# Altium PCB PCB1.pcbdoc
Units mil, origin at the board's own origin, x right, y up, seen from the top; angles counter-clockwise.
Board outline 3750 x 4952.59 mil, 2 copper layers (Top Layer, Bottom Layer); 99 components, 79 nets, 339 pads, 110 vias.
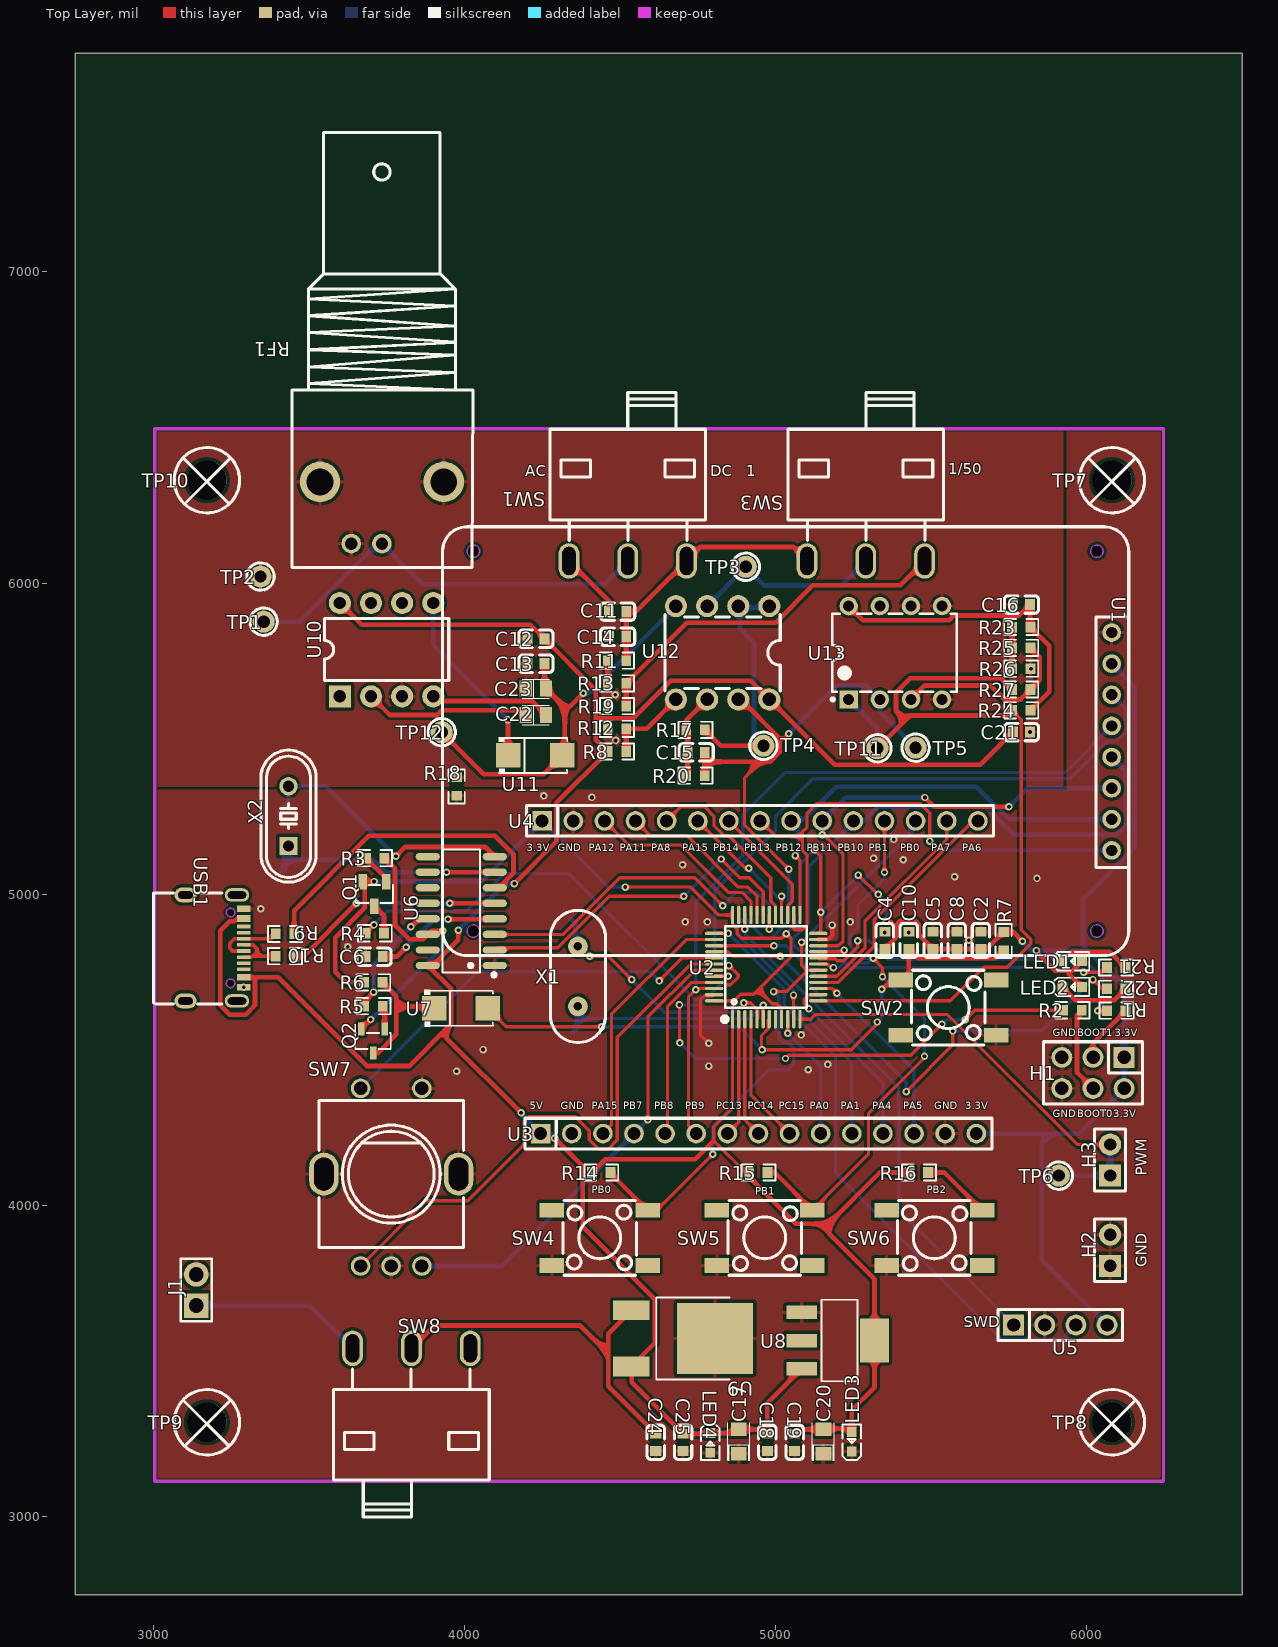
[diagram p0: Top Layer view]
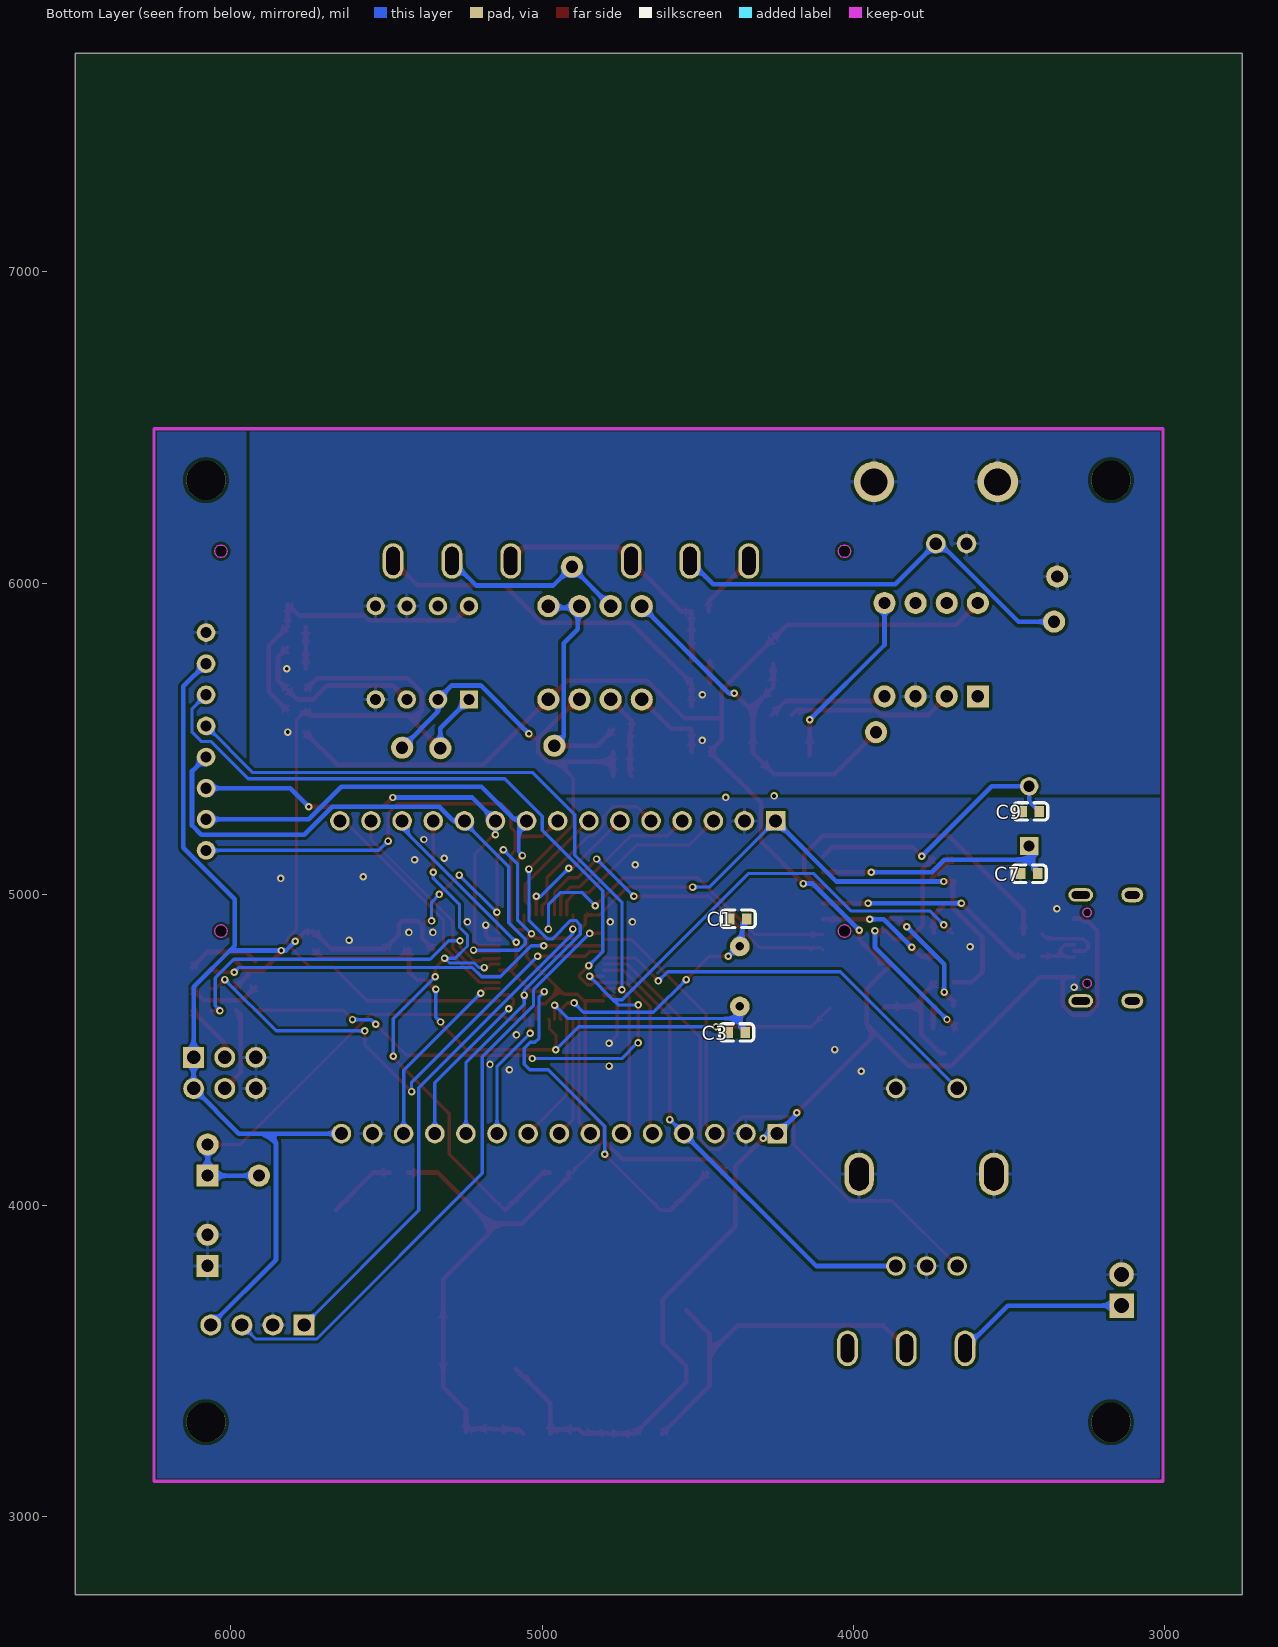
[diagram p1: Bottom Layer view, seen from below]

## Layer stack, top to bottom
Top Solder Mask Layer: solder mask 0.4, Solder Resist, Dk 3.5
Top Layer: signal copper 1.4
Dielectric1: dielectric 12.6, FR-4, Dk 4.8
Bottom Layer: signal copper 1.4
Bottom Solder Mask Layer: solder mask 0.4, Solder Resist, Dk 3.5

## Board outline
6500,2750 2750,2750 2750,7702.59 6500,7702.59

## Design rules (kind name [scope] priority, off if disabled: settings)
BoardOutlineClearance copperThickness1oz_1 [All] p1: gap=10 ignorepadtopadclearanceinfootprint=FALSE except(0: Arc-SplitContinuation Track-SplitContinuation SMDPad-SplitContinuation THPad-SplitContinuation Via-SplitContinuation Fill-SplitContinuation Poly-SplitContinuation Region-SplitContinuation Text-SplitContinuation; 6: Track-CutoutEdge SMDPad-CutoutEdge THPad-CutoutEdge Via-CutoutEdge Region-CutoutEdge; 11.8: Track-OutlineEdge SMDPad-OutlineEdge THPad-OutlineEdge Via-OutlineEdge Fill-OutlineEdge Fill-CutoutEdge Poly-OutlineEdge Region-OutlineEdge Text-OutlineEdge)
BoardOutlineClearance copperThickness2oz_1 [All] p2: gap=10 ignorepadtopadclearanceinfootprint=FALSE except(0: Arc-SplitContinuation Track-SplitContinuation SMDPad-SplitContinuation THPad-SplitContinuation Via-SplitContinuation Fill-SplitContinuation Poly-SplitContinuation Region-SplitContinuation Text-SplitContinuation; 6: Track-CutoutEdge SMDPad-CutoutEdge THPad-CutoutEdge Via-CutoutEdge Region-CutoutEdge; 11.8: Track-OutlineEdge SMDPad-OutlineEdge THPad-OutlineEdge Via-OutlineEdge Fill-OutlineEdge Fill-CutoutEdge Poly-OutlineEdge Region-OutlineEdge Text-OutlineEdge)
Clearance copperThickness1oz [(InNet('PD0') OR InNet('GND') OR InNet('3.3V') OR InNet('PD1') OR InNet('$1N3764') OR InNet('$1N4985') OR InNet('$1N4983') OR InNet('NRST') OR InNet('$1N8215') OR InNet('$1N7428') OR InNet('+5V') OR InNet('AGND') OR InNet('-5V') OR InNet('$1N7417') OR InNet('3V3') OR InNet('$1N9080') OR InNet('$1N9081') OR InNet('VBAT1') OR InNet('$1N9083') OR InNet('$1N3118') OR InNet('$1N3144') OR InNet('VBAT') OR InNet('$1N2700') OR InNet('$1N7921') OR InNet('PA2') OR InNet('PA3') OR InNet('PA4') OR InNet('PA5') OR InNet('PA6') OR InNet('$1N5468') OR InNet('$1N5472') OR InNet('$1N5608') OR InNet('$1N5280') OR InNet('$1N5593') OR InNet('BOOT1') OR InNet('BOOT0') OR InNet('$1N5306') OR InNet('$1N7431') OR InNet('D-') OR InNet('DN') OR InNet('D+') OR InNet('DP') OR InNet('$1N7412') OR InNet('$1N7434') OR InNet('PB0') OR InNet('PB1') OR InNet('PB2') OR InNet('$1N7426') OR InNet('PB3') OR InNet('PB4') OR InNet('$1N8720') OR InNet('$1N8718') OR InNet('$1N8207') OR InNet('$1N7427') OR InNet('PB6') OR InNet('PB7') OR InNet('PB5') OR InNet('PA7') OR InNet('PC13') OR InNet('PC14') OR InNet('PC15') OR InNet('PA0') OR InNet('PA1') OR InNet('PB10') OR InNet('PB11') OR InNet('PB12') OR InNet('PB13') OR InNet('PB14') OR InNet('PB15') OR InNet('PA8') OR InNet('PA9') OR InNet('PA10') OR InNet('PA11') OR InNet('PA12') OR InNet('PA13') OR InNet('PA14') OR InNet('PA15') OR InNet('PB8') OR InNet('PB9'))] p1: gap=6 ignorepadtopadclearanceinfootprint=FALSE except(4: Track-Track; 6.9: Track-Hole SMDPad-Hole THPad-Hole Via-Hole Fill-Hole Poly-Hole Region-Hole Text-Hole; 7: Arc-Arc Arc-Track Arc-SMDPad Arc-THPad Arc-Via Arc-Fill Arc-Poly Arc-Region Arc-Text Arc-Hole; 11.8: Track-Fill Fill-Region)
Clearance copperThickness2oz [All] p2: gap=6 ignorepadtopadclearanceinfootprint=FALSE except(0: Track-Text SMDPad-Text THPad-Text Via-Text Fill-Text Poly-Text Region-Text Text-Text; 6.9: Track-Hole SMDPad-Hole THPad-Hole Via-Hole Fill-Hole Poly-Hole Region-Hole Text-Hole; 7: Arc-Arc Arc-Track Arc-SMDPad Arc-THPad Arc-Via Arc-Fill Arc-Poly Arc-Region Arc-Text Arc-Hole; 8: Track-Track; 11.8: Track-Fill Fill-Region)
DiffPairsRouting differentialPair [All] p1: maxlimit=6 minlimit=6 mostfreqgap=6 toplayer_minwidth=5 toplayer_maxwidth=100 toplayer_prefwidth=10 bottomlayer_minwidth=5 bottomlayer_maxwidth=100 bottomlayer_prefwidth=10 maxuncoupledlength=10
PasteMaskExpansion pasteMaskExpansion [All] p1: expansion=0
PlaneConnect innerPlane [All] p1: planeconnectstyle=Relief reliefexpansion=20 reliefentries=4 reliefconductorwidth=10 reliefairgap=10
PolygonConnect copperRegion [All] p1: connectstyle=Relief reliefconductorwidth=10 reliefentries=4 polygonreliefangle="90 Angle" airgapwidth=10
RoutingVias viaSize [All] p1: holewidth=12 width=24 viastyle="Through Hole" minholewidth=11.8 minwidth=19.7 maxholewidth=248 maxwidth=393.7
SolderMaskExpansion solderMaskExpansion [All] p1: expansion=2 istentingtop=FALSE useseparateexpansions=TRUE expansionbottom=2 istentingbottom=FALSE
Width copperThickness1oz_2 [All] p1: maxlimit=100 minlimit=5 preferedwidth=15
Width copperThickness2oz_2 [All] p2: maxlimit=100 minlimit=8 preferedwidth=10
27 further rules are at their usual default settings.

## Components (designator, comment, footprint, x,y, rotation, side; value= is the part's Value field where it differs from the comment)
C1 "CL10C220JB8NNNC" C0603 4370,4921.49 r180 bottom
C2 "CAP_0603" C0603 5659.79,4852.37 r90 top
C3 "CL10C220JB8NNNC" C0603 4375,4556.49 r180 bottom
C4 "CAP_0603" C0603 5350.89,4852.37 r90 top
C5 "CAP_0603" C0603 5505.34,4852.37 r90 top
C6 "CAP_0603" C0603 3710.02,4800.06 r180 top
C7 "CL10C220JB8NNNC" C0603 3435.12,5066.49 r180 bottom
C8 "CAP_0603" C0603 5582.56,4852.38 r270 top
C9 "CL10C220JB8NNNC" C0603 3430.12,5266.49 r180 bottom
C10 "CAP_0603" C0603 5428.11,4852.37 r90 top
C11 "CAP_0603" C0603 4492.68,5908.93 r180 top
C12 "CGA0603X7R104K500JT" C0603 4230,5821.49 r0 top
C13 "CGA0603X7R104K500JT" C0603 4230,5741.49 r0 top
C14 "CAP_0603" C0603 4492.68,5828.04 r180 top
C15 "CL10C100JB8NNNC" C0603 4745,5456.49 r0 top
C16 "CGA0603X7R104K500JT" C0603 5790,5931.49 r180 top
C17 "TLJR226M010R3800" CAP-SMD_L2.0-W1.3-FD 4881.74,3241.96 r90 top
C18 "CAP_0603" C0603 4973.61,3239.61 r270 top
C19 "CAP_0603" C0603 5061.47,3239.61 r270 top
C20 "TLJR226M010R3800" CAP-SMD_L2.0-W1.3-FD 5153.34,3241.96 r90 top
C21 "CGA0603X7R104K500JT" C0603 5790,5521.61 r0 top
C22 "TAJP106M010RNJ" CAP-SMD_L2.1-W1.4-FD 4230,5576.49 r0 top
C23 "TAJP106M010RNJ" CAP-SMD_L2.1-W1.4-FD 4229.96,5661.49 r0 top
C24 "CC0603KRX7R8BB334" C0603 4615,3239.61 r270 top
C25 "CAP_0603" C0603 4702.86,3239.61 r270 top
H1 "PZ254V-12-6P" HDR-TH_6P-P2.54-V-M-R2-C3-S2.54 6020,4426.49 r180 top
H2 "HDR-M_2.54_1x2P" HDR-TH_2P-P2.54-V-M-1 6075,3856.49 r90 top
H3 "HDR-M_2.54_1x2P" HDR-TH_2P-P2.54-V-M-1 6075,4146.49 r90 top
J1 "电源端子" 2.54-1x2p 3140,3731.49 r90 top
LED1 "LTST-C190KSKT" LED0603-RD 5953.08,4785.18 r0 top
LED2 "LTST-C190KSKT" LED0603-RD 5953.08,4702.47 r0 top
LED3 "LTST-C190KSKT" LED0603-RD 5245,3241.49 r90 top
LED4 "LTST-C190KSKT" LED0603-RD 4790.08,3237.58 r270 top
Q1 "S8550_C20069126" SOT-23-3_L2.9-W1.3-P1.90-LS2.4-BR 3710.97,5001.49 r90 top
Q2 "S8050_C20069125" SOT-23-3_L2.9-W1.3-P1.90-LS2.3-BR 3706.54,4529.09 r90 top
R1 "Res_0603" R0603 6095,4626.49 r0 top
R2 "Res_0603" R0603 5954.07,4627.75 r180 top
R3 "Res_0603" R0603 3713.01,5116.49 r180 top
R4 "Res_0603" R0603 3712.33,4875.25 r180 top
R5 "Res_0603" R0603 3708.01,4641.15 r0 top
R6 "Res_0603" R0603 3707.33,4717.39 r0 top
R7 "Res_0603" R0603 5733.06,4850.18 r90 top
R8 "Res_0603" R0603 4490.49,5459.14 r0 top
R9 "Res_0603" R0603 3423.54,4873.04 r0 top
R10 "Res_0603" R0603 3423.54,4801.8 r0 top
R11 "Res_0603" R0603 4490.49,5751.1 r0 top
R12 "Res_0603" R0603 4490.49,5532.13 r180 top
R13 "Res_0603" R0603 4490.49,5678.11 r180 top
R14 "Res_0603" R0603 4440,4106.49 r180 top
R15 "Res_0603" R0603 4945,4106.49 r180 top
R16 "Res_0603" R0603 5460.68,4106.49 r180 top
R17 "Res_0603" R0603 4742.81,5528.74 r0 top
R18 "Res_0603" R0603 3975.34,5346.83 r90 top
R19 "Res_0603" R0603 4490.49,5605.12 r0 top
R20 "Res_0603" R0603 4742.81,5381.49 r0 top
R21 "Res_0603" R0603 6094.33,4765.18 r180 top
R22 "Res_0603" R0603 6094.32,4696.49 r180 top
R23 "Res_0603" R0603 5789.32,5859.14 r0 top
R24 "Res_0603" R0603 5789.32,5591.49 r0 top
R25 "Res_0603" R0603 5789.32,5792.23 r180 top
R26 "Res_0603" R0603 5789.32,5725.31 r180 top
R27 "Res_0603" R0603 5789.32,5658.4 r0 top
RF1 "KH-BNC75-3511" ANT-TH_KH-BNC75-3511 3735,6226.49 r180 top
SW1 "SS12D10G3-WJ" SW-TH_3P-P4.80_HX-SS12D10G3-WJ 4525,6071.49 r180 top
SW2 "SH-6X6X5H-TP" SW-SMD_SH-6X6X4.5H-TP 5555,4636.49 r0 top
SW3 "SS12D10G3-WJ" SW-TH_3P-P4.80_HX-SS12D10G3-WJ 5290,6071.49 r180 top
SW4 "SH-6X6X5H-TP" SW-SMD_SH-6X6X4.5H-TP 4435,3896.49 r180 top
SW5 "SH-6X6X5H-TP" SW-SMD_SH-6X6X4.5H-TP 4965,3896.49 r0 top
SW6 "SH-6X6X5H-TP" SW-SMD_SH-6X6X4.5H-TP 5510,3896.49 r0 top
SW7 "EC11L1525E05" SW-TH_EC11L1525E05 3765,4091.49 r0 top
SW8 "SS12D10G3-WJ" SW-TH_3P-P4.80_HX-SS12D10G3-WJ 3830,3541.49 r0 top
TP1 "TP-黄色测试点" TESTPOINT-TH_BD3.2 3355,5876.49 r0 top
TP2 "TP-黄色测试点" TESTPOINT-TH_BD3.2 3345,6021.49 r0 top
TP3 "TP-黄色测试点" TESTPOINT-TH_BD3.2 4904.21,6052.7 r0 top
TP4 "TP-黄色测试点" TESTPOINT-TH_BD3.2 4960.9,5477.7 r0 top
TP5 "TP-黄色测试点" TESTPOINT-TH_BD3.2 5450,5471.49 r0 top
TP6 "TP-黄色测试点" TESTPOINT-TH_BD3.2 5910,4096.49 r0 top
TP7 "M3螺丝" ?#1 6083,6328.49 r0 top
TP8 "M3螺丝" ?#1 6083,3301.49 r0 top
TP9 "M3螺丝" ?#1 3175,3301.49 r0 top
TP10 "M3螺丝" ?#1 3175,6328.49 r0 top
TP11 "TP-黄色测试点" TESTPOINT-TH_BD3.2 5327.08,5469.69 r0 top
TP12 "TP-黄色测试点" TESTPOINT-TH_BD3.2 3927.08,5521.47 r0 top
U1 "1.8寸TFT屏模块-8Pin" ?#2 3930,6181.49 r270 top
U2 "STM32F103C8T6" LQFP-48_L7.0-W7.0-P0.50-LS9.0-BL 4970,4766.49 r0 top
U3 "ZX-PZ2.54-1-15PZZ" HDR-TH_15P-P2.54-V-M 4945,4231.49 r0 top
U4 "ZX-PZ2.54-1-15PZZ" HDR-TH_15P-P2.54-V-M 4950,5236.49 r0 top
U5 "ZX-PZ2.54-1-4PZZ" HDR-TH_4P-P2.54-V-M 5915,3616.49 r0 top
U6 "CH340G" SOIC-16_L9.9-W3.9-P1.27-LS6.0-BL 3990,4946.49 r90 top
U7 "1N4007" SMA_L4.3-W2.6-LS5.1-RD 3989.07,4634.32 r0 top
U8 "AMS1117-3.3_C6186" SOT-223-3_L6.5-W3.4-P2.30-LS7.0-BR 5201.14,3566.49 r180 top
U9 "78M05_C347278" TO-252-2_L6.6-W6.1-P4.57-LS9.9-BR-CW 4670.94,3573.41 r180 top
U10 "XD7660" DIP-8_L9.7-W6.4-P2.54-LS7.6-BL 3750,5786.49 r0 top
U11 "1N4007" SMA_L4.3-W2.6-LS5.1-RD 4228.23,5446.48 r0 top
U12 "TL072IP" PDIP-8_L9.3-W6.4-P2.54-LS7.6-BL 4830,5776.49 r180 top
U13 "LM393P" DIP-8_L10.1-W6.3-P2.54-LS7.6-BL-1 5385,5776.49 r0 top
USB1 "TYPE-C 16PIN 2MD(073)" USB-C-SMD_TYPE-C-6PIN-2MD-073 3197.47,4828.04 r270 top
X1 "X49SD8MSD2SC" OSC-TH_L10.0-W4.5-P5.00 4365,4736.49 r0 top
X2 "X49SD12MSD2SC" HC-49US_L11.5-W4.5-P4.88 3435,5251.49 r90 top

## Footprints (in the part's own frame and the unit in brackets; to place one, negate y for a bottom-side part, rotate by r counter-clockwise, add the part's x,y. Pads: shape width x height; smd on the part's side, far side on the other; paste and mask are expansions set on the pad)
2.54-1x2p [mm]
  rect 2x2 hole 1.2: 1(-1.337,0.04)
  round 2 hole 1.2: 2(1.203,0.04)
  silkscreen extent -2.61,-1.23 2.47,1.31
ANT-TH_KH-BNC75-3511 [mil]
  round 63 hole 39.4 paste-99999 mask+1.97: 1(0,99.4) 2(98.4,99.4)
  round 129.9 hole 86.6 paste-99999 mask+1.97: 3(198.8,-99.4) 4(-198.8,-99.4)
  silkscreen extent -293,-1221 289,176
C0603 [mm]
  rect 0.8x0.9 smd: 1(-0.7,0) 2(0.7,0)
  silkscreen extent -1.39,-0.71 1.39,0.71
CAP-SMD_L2.0-W1.3-FD [mm]
  rect 1.1x1.3 smd paste+0 mask+0.05: 1(-1,0) 2(1,0)
  silkscreen extent -1.57,-0.89 1.52,0.89
CAP-SMD_L2.1-W1.4-FD [mm]
  rect 1x1.3 smd: 1(-0.825,0) 2(0.825,0)
  silkscreen extent -1.1,-0.78 1.1,0.78
DIP-8_L9.7-W6.4-P2.54-LS7.6-BL [mm]
  rect 1.8x1.8 hole 1 paste-2539.97 mask+0.05: 1(-3.81,-3.81)
  round 1.8 hole 1 paste-2539.97 mask+0.05: 2(-1.27,-3.81) 3(1.27,-3.81) 4(3.81,-3.81) 5(3.81,3.81) 6(1.27,3.81) 7(-1.27,3.81) 8(-3.81,3.81)
  silkscreen extent -5.08,-2.53 5.08,2.53
DIP-8_L10.1-W6.3-P2.54-LS7.6-BL-1 [mm]
  rect 1.5x1.5 hole 0.9: 1(-3.81,-3.81)
  round 1.5 hole 0.9: 2(-1.27,-3.81) 3(1.27,-3.81) 4(3.81,-3.81) 5(3.81,3.81) 6(1.27,3.81) 7(-1.27,3.81) 8(-3.81,3.81)
  silkscreen extent -5.23,-3.93 5.01,3.17
HC-49US_L11.5-W4.5-P4.88 [mm]
  rect 1.5x1.5 hole 0.9: 1(-2.44,0)
  round 1.5 hole 0.9: 2(2.44,0)
  silkscreen extent -5.39,-2.25 5.39,2.25
HDR-TH_2P-P2.54-V-M-1 [mm]
  rect 1.8x1.8 hole 1 paste-2539.97 mask+0.051: 1(-1.27,0)
  round 1.8 hole 1 paste-2539.97 mask+0.051: 2(1.27,0)
  silkscreen extent -2.54,-1.27 2.54,1.27
HDR-TH_4P-P2.54-V-M [mm]
  rect 1.7x1.7 hole 1.1: 1(-3.81,0)
  round 1.7 hole 1.1: 2(-1.27,0) 3(1.27,0) 4(3.81,0)
  silkscreen extent -5.08,-1.27 5.08,1.27
HDR-TH_6P-P2.54-V-M-R2-C3-S2.54 [mm]
  rect 1.7x1.7 hole 1.1: 1(-2.54,-1.27)
  round 1.7 hole 1.1: 2(-2.54,1.27) 3(0,-1.27) 4(0,1.27) 5(2.54,-1.27) 6(2.54,1.27)
  silkscreen extent -4.04,-2.54 4.04,2.54
HDR-TH_15P-P2.54-V-M [mm]
  rect 1.6x1.6 hole 1.05 paste-2539.97 mask+0.05: 1(-17.78,0)
  round 1.6 hole 1.05 paste-2539.97 mask+0.05: 2(-15.24,0) 3(-12.7,0) 4(-10.16,0) 5(-7.62,0) 6(-5.08,0) 7(-2.54,0) 8(0,0) 9(2.54,0) 10(5.08,0) 11(7.62,0) 12(10.16,0) 13(12.7,0) 14(15.24,0) 15(17.78,0)
  silkscreen extent -19.05,-1.25 19.05,1.25
LED0603-RD [mm]
  rect 0.8x0.8 smd: 1(-0.799,0) 2(0.799,0)
  silkscreen extent -1.49,-0.75 1.39,0.76
LQFP-48_L7.0-W7.0-P0.50-LS9.0-BL [mm]
  oval 0.27x1.5 smd paste+0 mask+0.05: 1(-2.75,-4.25) 2(-2.25,-4.25) 3(-1.75,-4.25) 4(-1.25,-4.25) 5(-0.75,-4.25) 6(-0.25,-4.25) 7(0.25,-4.25) 8(0.75,-4.25) 9(1.25,-4.25) 10(1.75,-4.25) 11(2.25,-4.25) 12(2.75,-4.25) 25(2.75,4.25) 26(2.25,4.25) 27(1.75,4.25) 28(1.25,4.25) 29(0.75,4.25) 30(0.25,4.25) 31(-0.25,4.25) 32(-0.75,4.25) 33(-1.25,4.25) 34(-1.75,4.25) 35(-2.25,4.25) 36(-2.75,4.25)
  oval 1.5x0.27 smd paste+0 mask+0.05: 13(4.25,-2.75) 14(4.25,-2.25) 15(4.25,-1.75) 16(4.25,-1.25) 17(4.25,-0.75) 18(4.25,-0.25) 19(4.25,0.25) 20(4.25,0.75) 21(4.25,1.25) 22(4.25,1.75) 23(4.25,2.25) 24(4.25,2.75) 37(-4.25,2.75) 38(-4.25,2.25) 39(-4.25,1.75) 40(-4.25,1.25) 41(-4.25,0.75) 42(-4.25,0.25) 43(-4.25,-0.25) 44(-4.25,-0.75) 45(-4.25,-1.25) 46(-4.25,-1.75) 47(-4.25,-2.25) 48(-4.25,-2.75)
  silkscreen extent -3.59,-4.46 3.3,3.34
OSC-TH_L10.0-W4.5-P5.00 [mm]
  round 1.6 hole 0.7: 1(0,2.45) 2(0,-2.45)
  silkscreen extent -2.25,-5.39 2.25,5.39
PDIP-8_L9.3-W6.4-P2.54-LS7.6-BL [mm]
  round 1.8 hole 1.1: 1(-3.81,-3.81) 2(-1.27,-3.81) 3(1.27,-3.81) 4(3.81,-3.81) 5(3.81,3.81) 6(1.27,3.81) 7(-1.27,3.81) 8(-3.81,3.81)
  silkscreen extent -4.7,-3.11 4.7,3.11
R0603 [mil]
  rect 31.75x34.02 smd paste-3937.01 mask+2: 1(-29.66,0) 2(29.66,0)
  silkscreen extent -55,-26 55,26
SMA_L4.3-W2.6-LS5.1-RD [mm]
  rect 2x2 smd: 1(-2.2,0) 2(2.2,0)
  silkscreen extent -2.98,-1.5 2.6,1.5
SOIC-16_L9.9-W3.9-P1.27-LS6.0-BL [mil]
  oval 23.7x77.6 smd: 1(-175,-107.7) 2(-125,-107.7) 3(-75,-107.7) 4(-25,-107.7) 5(25,-107.7) 6(75,-107.7) 7(125,-107.7) 8(175,-107.7) 9(175,107.7) 10(125,107.7) 11(75,107.7) 12(25,107.7) 13(-25,107.7) 14(-75,107.7) 15(-125,107.7) 16(-175,107.7)
  silkscreen extent -211,-111 198,60
SOT-23-3_L2.9-W1.3-P1.90-LS2.3-BR [mm]
  rect 1.07x0.532 smd: 1(0.99,-0.95) 2(0.99,0.95) 3(-0.99,0)
  silkscreen extent -0.66,-1.45 0.64,1.45
SOT-23-3_L2.9-W1.3-P1.90-LS2.4-BR [mm]
  rect 1.25x0.7 smd: 1(1,-0.95) 2(1,0.95) 3(-1,0)
  silkscreen extent -0.73,-1.53 0.73,1.53
SOT-223-3_L6.5-W3.4-P2.30-LS7.0-BR [mm]
  rect 2.5x1.1 smd: 1(2.97,-2.3) 2(2.97,0) 3(2.97,2.3)
  rect 2.34x3.6 smd: 4(-2.97,0)
  silkscreen extent -1.57,-3.33 1.37,3.33
SW-SMD_SH-6X6X4.5H-TP [mm]
  rect 2x1.2 smd paste+0 mask+0.05: 1(-3.9,-2.25) 2(-3.9,2.25) 3(3.9,-2.25) 4(3.9,2.25)
  silkscreen extent -3,-3.05 3,3.05
SW-TH_3P-P4.80_HX-SS12D10G3-WJ [mm]
  oval 1.7x2.9 hole 1.1 slot 2.3 at 90 deg paste-2539.97 mask+0.05: 1(-4.8,0) 2(0,0) 3(4.8,0)
  silkscreen extent -6.35,-13.75 6.35,-1.68
SW-TH_EC11L1525E05 [mm]
  oval 2.4x3.5 hole 1.6 slot 2.7 at 90 deg: 6(-5.5,0.25) 7(5.5,0.25)
  round 1.6 hole 1.1: A(-2.5,-7.25) B(2.5,-7.25) C(0,-7.25) D(-2.5,7.25) E(2.5,7.25)
  silkscreen extent -5.9,-5.75 5.9,6.25
TESTPOINT-TH_BD3.2 [mm]
  round 1.8 hole 1 paste-2539.97 mask+0.05: 1(0,0)
  silkscreen extent -1.12,-1.12 1.12,1.12
TO-252-2_L6.6-W6.1-P4.57-LS9.9-BR-CW [mm]
  rect 3x1.6 smd: 1(3.424,-2.29) 3(3.424,2.29)
  rect 6.2x5.8 smd: 2(-3.424,0)
  silkscreen extent -4.58,-3.35 1.38,3.35
USB-C-SMD_TYPE-C-6PIN-2MD-073 [mm]
  rect 0.55x1.1 smd paste-100 mask+0.05: 1(-3.2,2.375) 2(-2.4,2.375) 11(2.4,2.375) 12(3.2,2.375)
  rect 0.3x1.1 smd paste-100 mask+0.05: 3(-1.75,2.375) 4(-1.25,2.375) 5(-0.75,2.375) 6(-0.25,2.375) 7(0.25,2.375) 8(0.75,2.375) 9(1.25,2.375) 10(1.75,2.375)
  oval 1.2x1.8 hole 0.6 slot 1.2 at 90 deg paste-2539.97 mask+0.05: 13(-4.325,-2.375) 14(4.325,-2.375)
  oval 1.1x2 hole 0.6 slot 1.5 at 90 deg paste-2539.97 mask+0.05: 13(-4.325,1.825) 14(4.325,1.825)
  Board Outline Layer board cut-out: -2.89,1.655 -2.82,1.655 -2.692,1.602 -2.593,1.503 -2.54,1.375 -2.54,1.235 -2.593,1.107 -2.692,1.008 -2.82,0.955 -2.89,0.955 -2.96,0.955 -3.088,1.008 -3.187,1.107 -3.24,1.235 -3.24,1.375 -3.187,1.503 -3.088,1.602 -2.96,1.655 -2.89,1.655
  Board Outline Layer board cut-out: 2.89,1.655 2.96,1.655 3.088,1.602 3.187,1.503 3.24,1.375 3.24,1.235 3.187,1.107 3.088,1.008 2.96,0.955 2.89,0.955 2.821,0.955 2.692,1.008 2.593,1.107 2.54,1.235 2.54,1.375 2.593,1.503 2.692,1.602 2.821,1.655 2.89,1.655
  Board Outline Layer circle w0.005: c-2.89,1.305 r0.35
  Board Outline Layer circle w0.005: c2.89,1.305 r0.35
  Board Outline Layer region: -2.89,1.655 -2.82,1.655 -2.692,1.602 -2.593,1.503 -2.54,1.375 -2.54,1.235 -2.593,1.107 -2.692,1.008 -2.82,0.955 -2.89,0.955 -2.96,0.955 -3.088,1.008 -3.187,1.107 -3.24,1.235 -3.24,1.375 -3.187,1.503 -3.088,1.602 -2.96,1.655 -2.89,1.655
  Board Outline Layer region: 2.89,1.655 2.96,1.655 3.088,1.602 3.187,1.503 3.24,1.375 3.24,1.235 3.187,1.107 3.088,1.008 2.96,0.955 2.89,0.955 2.821,0.955 2.692,1.008 2.593,1.107 2.54,1.235 2.54,1.375 2.593,1.503 2.692,1.602 2.821,1.655 2.89,1.655
  silkscreen extent -4.5,-4.97 4.57,0.6
?#1 [mil]
  round 126 hole 126 paste-99999 mask+4: 1(-2.5,2.5)
  silkscreen extent -107,-102 102,107
?#2 [mil]
  round 60 hole 36 paste-99999 mask+2: 1(340,2150) 2(440,2150) 3(540,2150) 4(640,2150) 5(740,2150) 6(840,2150) 7(940,2150) 8(1040,2150)
  Board Outline Layer board cut-out: 78.74,2122.36 82.72,2122.36 90.07,2119.31 95.7,2113.69 98.74,2106.34 98.74,2098.38 95.7,2091.03 90.07,2085.4 82.72,2082.36 78.74,2082.36 74.76,2082.36 67.41,2085.4 61.79,2091.03 58.74,2098.38 58.74,2106.34 61.79,2113.69 67.41,2119.31 74.76,2122.36 78.74,2122.36
  Board Outline Layer board cut-out: 1299.21,2122.36 1303.19,2122.36 1310.54,2119.31 1316.17,2113.69 1319.21,2106.34 1319.21,2098.38 1316.17,2091.03 1310.54,2085.4 1303.19,2082.36 1299.21,2082.36 1295.23,2082.36 1287.88,2085.4 1282.26,2091.03 1279.21,2098.38 1279.21,2106.34 1282.26,2113.69 1287.88,2119.31 1295.23,2122.36 1299.21,2122.36
  Board Outline Layer board cut-out: 1299.21,118.82 1303.19,118.82 1310.54,115.77 1316.17,110.15 1319.21,102.8 1319.21,94.84 1316.17,87.49 1310.54,81.86 1303.19,78.82 1299.21,78.82 1295.23,78.82 1287.88,81.86 1282.26,87.49 1279.21,94.84 1279.21,102.8 1282.26,110.15 1287.88,115.77 1295.23,118.82 1299.21,118.82
  Board Outline Layer board cut-out: 78.74,118.82 82.72,118.82 90.07,115.77 95.7,110.15 98.74,102.8 98.74,94.84 95.7,87.49 90.07,81.86 82.72,78.82 78.74,78.82 74.76,78.82 67.41,81.86 61.79,87.49 58.74,94.84 58.74,102.8 61.79,110.15 67.41,115.77 74.76,118.82 78.74,118.82
  Board Outline Layer circle w1: c78.74,2102.36 r20
  Board Outline Layer circle w1: c1299.21,2102.36 r20
  Board Outline Layer circle w1: c1299.21,98.82 r20
  Board Outline Layer circle w1: c78.74,98.82 r20
  Board Outline Layer region: 78.74,2122.36 82.72,2122.36 90.07,2119.31 95.7,2113.69 98.74,2106.34 98.74,2098.38 95.7,2091.03 90.07,2085.4 82.72,2082.36 78.74,2082.36 74.76,2082.36 67.41,2085.4 61.79,2091.03 58.74,2098.38 58.74,2106.34 61.79,2113.69 67.41,2119.31 74.76,2122.36 78.74,2122.36
  Board Outline Layer region: 1299.21,2122.36 1303.19,2122.36 1310.54,2119.31 1316.17,2113.69 1319.21,2106.34 1319.21,2098.38 1316.17,2091.03 1310.54,2085.4 1303.19,2082.36 1299.21,2082.36 1295.23,2082.36 1287.88,2085.4 1282.26,2091.03 1279.21,2098.38 1279.21,2106.34 1282.26,2113.69 1287.88,2119.31 1295.23,2122.36 1299.21,2122.36
  Board Outline Layer region: 1299.21,118.82 1303.19,118.82 1310.54,115.77 1316.17,110.15 1319.21,102.8 1319.21,94.84 1316.17,87.49 1310.54,81.86 1303.19,78.82 1299.21,78.82 1295.23,78.82 1287.88,81.86 1282.26,87.49 1279.21,94.84 1279.21,102.8 1282.26,110.15 1287.88,115.77 1295.23,118.82 1299.21,118.82
  Board Outline Layer region: 78.74,118.82 82.72,118.82 90.07,115.77 95.7,110.15 98.74,102.8 98.74,94.84 95.7,87.49 90.07,81.86 82.72,78.82 78.74,78.82 74.76,78.82 67.41,81.86 61.79,87.49 58.74,94.84 58.74,102.8 61.79,110.15 67.41,115.77 74.76,118.82 78.74,118.82
  silkscreen extent 0,0 1378,2205

## Via types
v1: diameter 24, hole 12, Top Layer to Bottom Layer, 81 vias
v2: diameter 24.02, hole 12.01, Top Layer to Bottom Layer, 29 vias

## Nets (pads, with @x,y where several pads share a name; then routed paths per layer and width w, separated by ;. In a path a pad name is that pad's centre, name@x,y a point inside that pad or via, vN(x,y) a via of type N, cw(c..) or ccw(c..) an arc to the next point about the centre after c; other vN are vias at no path point)
3.3V: C2.1 C4.1 C5.1 C8.2 C19.1 C20.2 H1.1 H1.2 LED1.2 LED2.2 LED3.2 Q1.2 R6.1 R7.2 R14.2 R15.2 R16.2 U1.2 U2.1 U2.9 U2.24 U2.36 U2.48 U3.15 U4.1 U5.4 U8.4 | length 10087.8
  Top Layer w10.63: v1(4516.73,5023.81) 4726.73,5023.81 4816.73,4933.81 U2.36 4861.73,4903.81 4876.73,4888.81 4876.73,4873.81 4891.73,4858.81 5019.31,4858.81 v1(5034.31,4873.81) 5049.31,4858.81 5049.31,4798.81 4944.31,4693.81 ; U2.48 4863.72,4658.22 ; R15.2 4904.41,4106.49 4801.73,4209.17 4801.73,4254.17 4861.73,4314.17 U2.1 4861.73,4653.22 4863.72,4655.2 4863.72,4658.22 ; U2.9 5019.21,4633.9 5004.31,4648.81 4989.31,4648.81 4944.31,4693.81 ; v1(5124.31,5143.81) 5145.34,5122.78 v1(5145.34,4942.78) 5145.34,4882.78 U2.24 ; v1(5266.02,5062.1) 5328.3,4999.81 v1(5330.34,4999.81) ; v1(5355.34,4914.81) 5370.34,4914.81 5385.34,4899.81 ; 4863.72,4658.22 4866.73,4658.22 4887.32,4678.81 4929.31,4678.81 4944.31,4693.81
  Top Layer w15: Q1.2 Q1.2@3680,5041.49 ; R6.1 3619.1,4717.39 3585,4751.49 3585,4861.49 3680,4956.49 Q1.2@3680,5041.49 ; v1(3710,5041.49) Q1.2@3680,5041.49 ; R14.2 4453.02,4149.17 4741.73,4149.17 4801.73,4209.17 ; R15.2 4915.34,4091.49 5065.34,3941.49 5170.34,3941.49 ; C19.1 5075.62,3281.33 C20.2 5155.43,3283.41 LED3.2@5244.99,3283.41 ; LED3.2 LED3.2@5244.99,3283.41 ; C4.1 5385.34,4859.26 5385.34,4899.81 5400.34,4914.81 5449.58,4914.81 5460.34,4904.06 5460.34,4869.81 C5.1 C8.2 C2.1 5678.03,4824.81 R7.2 5763.06,4879.84 v1(5793.06,4849.84) ; R16.2 5335.34,4106.49 5170.34,3941.49 ; v1(5838.06,4819.84) 5838.06,4815.18 5898.06,4755.18 5943.06,4755.18 ; LED2.2 5943.06,4743.97 5943.06,4755.18 ; LED1.2 5954.55,4755.18 5943.06,4755.18 ; 5170.34,3941.49 5170.34,3911.49 5318.07,3763.76 U8.4 5318.07,3416.49 5244.99,3343.41 LED3.2@5244.99,3283.41
  Bottom Layer w10.63: U4.1 4462.68,5023.81 v1(4516.73,5023.81) ; v1(5034.31,4873.81) 5079.31,4918.81 5079.31,5098.81 v1(5124.31,5143.81) ; v1(5145.34,4942.78) 5146.7,4942.78 v1(5266.02,5062.1) ; v1(5330.34,4999.81) 5355.34,4974.81 v1(5355.34,4914.81)
  Bottom Layer w15: v1(3710,5041.49) 4055,5041.49 U4.1 ; U3.15 5885,4231.49 ; v1(5793.06,4849.84) 5823.06,4819.84 v1(5838.06,4819.84) 6003.06,4819.84 ; U5.4 5855,3826.49 5855,4201.49 5885,4231.49 ; U1.2 6153.06,5668.42 6153.06,5149.84 5988.06,4984.84 5988.06,4834.84 6003.06,4819.84 ; 5885,4231.49 5975,4231.49 H1.2 H1.1 6120,4702.91 6003.06,4819.84
3V3: C16.1 R23.2 R24.2 U13.8 | length 1012.2
  Top Layer w15: U13.8 5280,5881.49 5557.56,5881.49 5572.56,5896.49 5782.56,5896.49 C16.1 5817.56,5860.56 R23.2 5878.98,5799.14 5878.98,5651.49 R24.2
$1N2700: LED1.1 R21.1 | length 235.5
  Top Layer w15: LED1.1 5951.6,4815.17 6074,4815.17 R21.1
$1N3118: H1.3 R1.2 | length 193.4
  Top Layer w15: H1.3 6020,4521.83 R1.2
$1N3144: H1.4 R2.1 | length 278.7
  Top Layer w15: R2.1 5968.73,4612.75 5968.73,4427.75 H1.4
$1N3764: C6.1 U6.4 | length 410.4
  Top Layer w15: C6.1 3782.58,4800.06 v1(3812.58,4830.06) ; v1(3947.58,4920.06) 4096.27,4920.06 U6.4
  Bottom Layer w15: v1(3812.58,4830.06) 3902.58,4920.06 v1(3947.58,4920.06)
$1N4983: C9.2 U6.8 X2.2 | length 875.7
  Top Layer w15: v1(3780,5122.55) 3810,5152.55 4066.64,5152.55 U6.8
  Bottom Layer w15: C9.2 3435,5298.93 3435,5347.55 3555,5347.55 v1(3780,5122.55)
$1N4985: C7.2 U6.7 X2.1 | length 792
  Top Layer w15: v1(3942.56,5071.49) U6.7
  Bottom Layer w15: C7.2 3422.56,5081.49 3422.56,5111.49 ; X2.1 3422.56,5142.99 3422.56,5111.49 ; v1(3942.56,5071.49) 3747.56,5071.49 3707.56,5111.49 3422.56,5111.49
$1N5280: Q2.2 R3.1 U6.14 | length 835.8
  Top Layer w15: Q2.2 v1(3699.14,4598.07) ; R3.1 3777.3,5081.86 3777.3,4901.49 3822.3,4856.49 3867.3,4856.49 U6.14 3893.89,4883.07 v1(3930.72,4883.07)
  Bottom Layer w15: v1(3699.14,4598.07) 3930.72,4829.65 v1(3930.72,4883.07)
$1N5306: R5.1 U6.13 | length 381.6
  Top Layer w15: R5.1 3678.35,4656.15 v1(3708.35,4686.15) ; v1(3828.35,4896.15) 3853.69,4921.49 U6.13
  Bottom Layer w15: v1(3708.35,4686.15) 3708.35,4776.15 v1(3828.35,4896.15)
$1N5468: Q1.1 R3.2 | length 102.6
  Top Layer w15: R3.2 3748.37,5051.47 Q1.1
$1N5472: Q1.3 R4.1 | length 99.7
  Top Layer w15: Q1.3 3741.99,4931.09 R4.1
$1N5593: Q2.1 R5.2 | length 75.7
  Top Layer w15: R5.2 3743.94,4634.88 Q2.1
$1N5608: Q2.3 R6.2 U7.1 | length 408.9
  Top Layer w15: Q2.3 3721.54,4490.1 3781.54,4550.1 3781.54,4640.1 ; R6.2 3781.54,4672.84 3781.54,4640.1 ; U7.1 3896.68,4640.1 3781.54,4640.1
$1N7412: R11.1 R13.2 | length 73
  Top Layer w15: R13.2 R11.1
$1N7417: C15.1 R17.1 R20.1 U12.6 | length 276.2
  Top Layer w15: R20.1 4717.44,5385.78 C15.1 4717.44,5524.45 R17.1 4713.15,5559.64 U12.6
$1N7426: R17.2 TP4.1 U12.1 U12.2 | length 788.4
  Top Layer w15: R17.2 4823.51,5477.7 TP4.1
  Bottom Layer w15: U12.2 U12.2@4885.9,5920.59 ; TP4.1 4930.9,5507.7 4930.9,5807.7 4885.9,5852.7 U12.2@4885.9,5920.59 ; U12.1 4974.1,5920.59 U12.2@4885.9,5920.59
$1N7427: SW3.2 TP3.1 U12.3 | length 620.9
  Bottom Layer w15: U12.3 4904.21,6050.69 TP3.1 4964.21,5992.7 5211.21,5992.7 SW3.2
$1N7428: C11.1 C14.1 R11.2 SW1.1 SW3.3 | length 843.1
  Top Layer w15: R11.2@4520.24,5751.2 C14.1 C11.1 4551.41,5908.93 SW1.1 4758.98,6116.49 5056.02,6116.49 SW3.3
$1N7431: R8.2 R12.1 U12.5 | length 271.9
  Top Layer w15: R8.2 R12.1 4585.65,5532.13 U12.5
$1N7434: R13.1 R19.2 SW3.1 | length 1194.8
  Top Layer w15: R19.2 R13.1 4715.15,5873.11 5000.15,5873.11 5120.15,5993.11 5400.6,5993.11 SW3.1
$1N7921: LED2.1 R22.1 | length 234.7
  Top Layer w15: LED2.1 5963.6,4660.47 6087.96,4660.47 R22.1
$1N8207: RF1.1 SW1.2 TP1.1 | length 1359
  Bottom Layer w15: TP1.1 3469.4,5876.49 3720,6127.09 RF1.1 3865.6,5996.49 4449.99,5996.49 SW1.2
$1N8215: C11.2 SW1.3 | length 216
  Top Layer w15: SW1.3 4465.12,5942.39 C11.2
$1N8718: R25.1 R27.2 U13.3 | length 593.2
  Top Layer w15: U13.3 5480,5671.49 5690,5671.49 5735,5626.49 5787.07,5626.49 R27.2 5848.98,5688.4 5848.98,5762.23 R25.1
$1N8720: R23.1 R25.2 R26.2 | length 133.8
  Top Layer w15: R26.2 R25.2 R23.1
$1N9080: C22.1 U10.2 | length 534.8
  Top Layer w15: U10.2 3760,5576.49 3912.52,5576.49 3927.52,5591.49 4182.52,5591.49 C22.1
$1N9081: C22.2 U10.4 | length 387.3
  Top Layer w15: U10.4 3915,5621.49 4217.48,5621.49 C22.2
$1N9083: U10.5 U11.1 | length 590.1
  Top Layer w15: v1(4140,5561.49) 4140,5448.1 U11.1
  Bottom Layer w15: U10.5 3900,5801.49 v1(4140,5561.49)
+5V: C12.2 C17.2 C18.1 C21.1 C25.1 LED4.1 R8.1 U3.1 U6.16 U8.3 U9.3 U10.8 U12.8 USB1.2 USB1.11 | length 7500.2
  Top Layer w15: USB1.11 3327.3,4733.54 ; USB1.2 3269.95,4922.52 3260.97,4913.54 3245.97,4913.54 3215.97,4883.54 3215.97,4643.54 3245.97,4613.54 3297.3,4613.54 3327.3,4643.54 3327.3,4733.54 ; U10.8 3670,5866.49 4212.56,5866.49 C12.2 4422.56,5656.49 4422.56,5566.49 ; v1(3980.83,4885.01) 3980.83,4855.01 3905.83,4780.01 3890.83,4780.01 U6.16 3957.3,4696.49 3957.3,4583.54 3942.3,4568.54 ; v1(4160.83,5035.01) 4295.83,5170.01 4295.83,5294.14 R8.1 4422.56,5497.41 4422.56,5566.49 ; v1(4182.3,4298.54) 3942.3,4538.54 3942.3,4568.54 ; v1(4290,4216.49) 4380,4126.49 4380,3931.49 4612.45,3699.04 4612.45,3558.6 4537.45,3483.6 4537.45,3432.58 C25.1 4788.19,3267.17 LED4.1 4869.47,3269.06 C17.2 4959.46,3281.33 C18.1 4973.61,3365.33 U8.3 ; C21.1 5657.32,5416.49 5190,5416.49 U12.8 4920,5686.49 4662.56,5686.49 4542.56,5566.49 4422.56,5566.49 ; 3327.3,4733.54 3402.3,4733.54 3687.3,4448.54 3822.3,4448.54 3942.3,4568.54
  Bottom Layer w15: v1(3980.83,4885.01) 4130.83,5035.01 v1(4160.83,5035.01) ; v1(4182.3,4298.54) 4182.3,4294.19 U3.1 4275,4231.49 v1(4290,4216.49)
-5V: C13.2 C23.2 TP12.1 U11.2 U12.4 | length 1285.7
  Top Layer w15: TP12.1 4062.07,5386.49 4254.85,5386.49 U11.2 4322.44,5454.08 4322.44,5601.49 ; C13.2 4257.56,5666.37 C23.2 4322.44,5601.49 ; v1(4382.44,5646.49) 4337.44,5601.49 4322.44,5601.49
  Bottom Layer w15: v1(4382.44,5646.49) 4400,5646.49 U12.4
AGND: C12.1 C13.1 C14.2 C16.2 C21.2 C23.1 R12.2 R18.2 R19.1 R26.1 RF1.2 RF1.3 RF1.4 TP2.1 U10.3 U13.4 U13.5 U13.6
  other v2: 4485.8,5494.77 5817.56,5521.61 4485,5641.49 5820.62,5725.31
BOOT0: R2.2 R4.2 U2.44 | length 3016.6
  Top Layer w10.63: R4.2 v1(3709.38,4901.96) ; v1(4691.22,4644.8) 4691.22,4523.41 v1(4691.88,4522.75) ; U2.44 v1(4847.68,4736.96) ; v1(5031.88,4472.75) 5042.51,4483.38 5435.05,4483.38 v1(5534.41,4582.75) ; v1(5609.41,4597.75) 5639.41,4627.75 R2.2
  Bottom Layer w10.63: v1(3709.38,4901.96) 3754.38,4946.96 4007.68,4946.96 4127.68,5066.96 4337.68,5066.96 4742.68,4661.96 4772.68,4661.96 ; v1(4691.22,4644.8) 4755.52,4644.8 4772.68,4661.96 ; v1(4691.88,4522.75) 4693.73,4522.75 4743.73,4472.75 v1(5031.88,4472.75) ; v1(4847.68,4736.96) 4772.68,4661.96 ; v1(5534.41,4582.75) 5549.41,4597.75 v1(5609.41,4597.75)
BOOT1: R1.1 U2.20 | length 1146.5
  Top Layer w10.63: U2.20 5140.38,4792.96 5191.14,4792.96 5197.61,4786.49 5219.01,4786.49 5264.01,4831.49 v1(5264.01,4851.49) ; v1(6035.34,4626.49) R1.1
  Bottom Layer w10.63: v1(5264.01,4851.49) 5300.34,4851.49 5360.34,4791.49 5990.34,4791.49 6050.34,4731.49 6050.34,4641.49 v1(6035.34,4626.49)
D+: R10.2 U6.5 | length 714.8
  Top Layer w15: R10.2 3483.2,4801.8 v1(3652.9,4971.49) ; v1(3952.9,4971.49) U6.5
  Bottom Layer w15: v1(3652.9,4971.49) v1(3952.9,4971.49)
D-: R9.2 U6.6 | length 1043
  Top Layer w15: R9.2 3453.2,4948.04 3693.2,5188.04 4098.2,5188.04 4157.7,5128.54 4157.7,5068.54 4112.7,5023.54 4099.75,5023.54 U6.6
DN: R9.1 USB1.5 USB1.7 | length 224.4
  Top Layer w11.81: USB1.7 3255.34,4818.19 3245.97,4827.56 3245.97,4842.56 3260.97,4857.56 USB1.5 3378.41,4857.56 R9.1
DP: R10.1 USB1.6 USB1.8 | length 175.7
  Top Layer w11.81: USB1.8 3315.6,4798.51 3318.88,4801.8 3333.88,4801.8 ; USB1.6 3320.97,4837.88 3333.88,4824.97 3333.88,4801.8 ; R10.1 3333.88,4801.8
GND: C1.1 C2.2 C3.1 C4.2 C5.2 C6.2 C7.1 C8.1 C9.1 C10.2 C17.1 C18.2 C19.2 C20.1 C24.2 C25.2 H1.5 H1.6 H2.1 H2.2 J1.2 LED3.1 LED4.2 R18.1 SW2.3 SW4.4 SW5.1 SW6.1 SW7.6 SW7.7 SW7.C SW7.E U1.1 U2.8 U2.23 U2.35 U2.47 U3.2 U3.14 U4.2 U5.2 U6.1 U8.1 U9.2 USB1.1 USB1.12 | length 284.8
  Top Layer w10: v2(4785,4521.49) 4758.66,4547.82 4758.66,4661.49 4771.71,4674.53 4799.31,4674.53 U2.47
  Top Layer w15: U2.23 5138.19,4855.94 5169.33,4855.94 5181.68,4868.29 v2(5181.68,4901.49)
  other v2: 3975,4431.49 5105,4436.49 4785,4448.38 5167.59,4453.85 4060,4501.49 5082.66,4548.39 3290.97,4702.05 3625,4831.49 5620.57,4852.38 5350.89,4877.96 5428.11,4877.96 4710,4911.49 4781,4911.49 5240,4911.49 3345.97,4954.02 5840,5051.49 5575,5056.49 4701.26,5095.48 5410,5111.49 5315,5116.49 5380,5176.49 4410,5311.49 4255,5316.49
NRST: C10.1 R7.1 SW2.2 U2.7 U7.2 | length 2077.2
  Top Layer w10: v1(4956.46,4501.07) 4955,4502.53 4955,4546.72 4976.48,4568.2 4976.48,4595.8 U2.7
  Top Layer w10.63: U7.2 4134.94,4575.07 v1(4441.46,4575.07) ; v1(4956.46,4501.07) 5242.46,4501.07 5326.46,4585.07 v1(5326.46,4590.07) ; v1(5341.46,4695.07) 5371.46,4725.07 SW2.2
  Top Layer w15: SW2.2 5428.11,4751.72 C10.1 5458.11,4794.81 5707.35,4794.81 R7.1
  Bottom Layer w10.63: v1(4441.46,4575.07) 4882.46,4575.07 v1(4956.46,4501.07) ; v1(5326.46,4590.07) 5341.46,4605.07 v1(5341.46,4695.07)
PA0: U2.10 U3.10 | length 411.6
  Top Layer w10.63: v1(5038.9,4554.17) U2.10
  Bottom Layer w10.63: v1(5038.9,4554.17) 5145,4448.07 U3.10
PA1: C15.2 R20.2 TP5.1 U2.11 U3.11 U12.7 U13.2 | length 2882.5
  Top Layer w10.63: 4952.56,5426.49 4900.06,5373.99 4900.06,5223.99 v1(5042.56,5081.49) ; v1(5057.56,4676.49) 5057.56,4600.19 U2.11
  Top Layer w15: R20.2 C15.2 ; 4772.56,5426.49 4952.56,5426.49 4982.56,5426.49 5012.56,5456.49 5012.56,5501.49 ; U12.7 4887.56,5626.49 5012.56,5501.49 ; v1(5042.56,5516.49) 5027.56,5501.49 5012.56,5501.49
  Bottom Layer w10.63: v1(5042.56,5081.49) 5042.56,4916.49 4982.56,4856.49 4967.56,4856.49 4907.56,4916.49 4892.56,4916.49 4877.56,4901.49 4877.56,4871.49 5057.56,4691.49 v1(5057.56,4676.49) 5057.56,4646.49 5245,4459.05 U3.11
  Bottom Layer w15: v1(5042.56,5516.49) 5197.56,5671.49 5290,5671.49 U13.2 5335,5586.49 TP5.1
PA2: H3.1 H3.2 TP6.1 U2.12 | length 1441
  Top Layer w10.63: U2.12 5112.68,4599.17 5127.68,4614.17 5552.32,4614.17 5970,4196.49 H3.2
  Bottom Layer w15: TP6.1 H3.1 H3.2
PA3: R24.1 R27.1 TP11.1 U2.13 U13.1 | length 2719.8
  Top Layer w10.63: U2.13 5561.39,4658.22 5669.66,4766.49 5744.66,4766.49 5819.66,4841.49 5819.66,4856.49 5789.66,4886.49 5789.66,5561.49 R24.1
  Top Layer w15: TP11.1 5417.08,5559.69 ; R24.1 5742.86,5574.69 5432.08,5574.69 5417.08,5559.69 ; R27.1 5723.37,5694.69 5432.08,5694.69 5387.08,5649.69 5387.08,5589.69 5417.08,5559.69
  Bottom Layer w15: U13.1 5327.08,5534.41 TP11.1
PA4: U2.14 U3.12 | length 587.3
  Top Layer w10.63: v1(5107.32,4632.91) 5092.32,4647.91 5092.32,4662.91 5107.32,4677.91 U2.14
  Bottom Layer w10.63: v1(5107.32,4632.91) 5345,4395.23 U3.12
PA5: U2.15 U3.13 | length 619.9
  Top Layer w10.63: U2.15 5182.32,4697.59 v1(5197.32,4682.59)
  Bottom Layer w10.63: v1(5197.32,4682.59) 5445,4434.91 U3.13
PA6: U2.16 U4.15 | length 778
  Top Layer w10.63: U2.16 5201.56,4717.28 5317.32,4833.03 5317.32,4918.81 5632.32,5233.81 5647.32,5233.81 U4.15
PA7: U2.17 U4.14 | length 705.6
  Top Layer w10.63: U2.17 5197.32,4736.96 5287.32,4826.96 5287.32,4913.81 5550,5176.49 U4.14
PA8: U2.29 U4.5 | length 591.3
  Top Layer w10.63: U4.5 4695,5281.49 4771.85,5281.49 4801.85,5251.49 4801.85,5221.49 4834.53,5188.81 4849.53,5188.81 4984.53,5053.81 4984.53,4978.81 4999.53,4963.81 U2.29
PA9: U2.30 U6.3 | length 1152
  Top Layer w10.63: U6.3 4317.52,4871.49 4499.84,5053.81 4739.84,5053.81 v1(4829.84,4963.81) ; v1(4979.84,4888.81) U2.30
  Bottom Layer w10.63: v1(4829.84,4963.81) 4872.52,5006.49 4940,5006.49 4979.84,4966.65 v1(4979.84,4888.81)
PA10: U2.31 U6.2 | length 1102
  Top Layer w10.63: U6.2 4105.02,4828.81 4300.16,4828.81 4465.16,4993.81 v1(4705.16,4993.81) ; v1(4825.16,5113.81) 4885.16,5053.81 4915.16,5053.81 4960.16,5008.81 U2.31
  Bottom Layer w10.63: v1(4705.16,4993.81) v1(4825.16,5113.81)
PA11: U2.32 U4.4 | length 551
  Top Layer w10.63: U4.4 4597.68,5188.81 4715.47,5188.81 4880.47,5023.81 4910.47,5023.81 4940.47,4993.81 U2.32
PA12: U2.33 U4.3 | length 622.5
  Top Layer w10.63: U4.3 4527.68,5158.81 4695.79,5158.81 4848.11,5006.49 4893.11,5006.49 4920.79,4978.81 U2.33
PA13: U2.34 U5.1 | length 1675.2
  Top Layer w10.63: v1(4901.1,4888.81) U2.34
  Bottom Layer w10.63: v1(4901.1,4888.81) 4901.1,4873.81 5396.1,4378.81 5396.1,3985.39 U5.1
PA14: U2.37 U5.3 | length 1970.3
  Top Layer w10.63: U2.37 v1(4847.68,4874.76)
  Bottom Layer w10.63: v1(4847.68,4874.76) 5027.68,4694.76 5027.68,4643.81 5192.68,4478.81 5192.68,4103.81 5725,3571.49 5920,3571.49 U5.3
PA15: U2.38 U3.3 | length 824.5
  Top Layer w10.63: U3.3 4472.68,4259.17 4472.68,4615.07 4712.68,4855.07 U2.38
PB0: R14.1 SW4.1 U2.18 U4.13 | length 1968.8
  Top Layer w10.63: SW4.1 4618.54,3985.07 v1(4798.54,4165.07) ; v1(4993.54,4687.87) 5034.15,4687.87 5098.54,4752.26 5098.54,4756.65 ; v1(5083.54,4846.65) 5083.54,4771.65 5098.54,4756.65 ; U2.18 5098.54,4756.65
  Top Layer w15: R14.1 4469.66,4103.95 SW4.1
  Bottom Layer w10.63: v1(4798.54,4165.07) 4798.54,4255.07 4979.96,4436.49 5040,4436.49 5057.93,4454.42 5057.93,4505.67 5038.54,4525.07 5023.54,4525.07 5010,4538.61 5010,4671.41 v1(4993.54,4687.87) ; v1(5083.54,4846.65) 5450,5213.11 U4.13
PB1: R15.1 SW5.4 U2.19 U4.12 | length 1952.5
  Top Layer w10.63: SW5.4 5298.54,4165.07 5298.54,4295.03 5478.54,4475.03 v1(5478.54,4480.07) ; U2.19 5167.32,4776.33 5178.58,4765.07 v1(5186.06,4765.07) ; v1(5313.54,4795.07) 5343.54,4765.07 v1(5343.54,4735.07) ; v1(5350,5071.53) U4.12
  Top Layer w15: R15.1 4997.12,4106.49 SW5.4
  Bottom Layer w10: v1(5186.06,4765.07) 5204.32,4765.07 5218.74,4779.49 5297.96,4779.49 v1(5313.54,4795.07) 5279.23,4795.07 5240,4834.3 5240,4868.67 5265,4893.67 5265,4967 5350,5052 v1(5350,5071.53)
  Bottom Layer w10.63: v1(5343.54,4735.07) 5478.54,4600.07 v1(5478.54,4480.07)
PB2: R16.1 SW6.4 | length 223.5
  Top Layer w15: R16.1 5542.12,4106.49 SW6.4
PB3: R21.2 U2.39 | length 1328.4
  Top Layer w10.63: U2.39 v1(4994.89,4835.39) ; v1(5989.67,4750.18) 6049.67,4750.18 R21.2
  Bottom Layer w10.63: v1(4994.89,4835.39) 5034.46,4835.39 5134.67,4735.18 5194.67,4735.18 5224.67,4765.18 5974.67,4765.18 v1(5989.67,4750.18)
PB4: R22.2 U2.40 | length 1654.2
  Top Layer w10.63: U2.40 4803.47,4816.49 4846.89,4816.49 4861.89,4801.49 v1(5014.66,4801.49) ; v1(5419.66,4366.49) 5569.66,4516.49 v1(5569.66,4561.49) ; v1(6019.66,4726.49) 6049.66,4696.49 R22.2
  Bottom Layer w10.63: v1(5014.66,4801.49) 5419.66,4396.49 v1(5419.66,4366.49) ; v1(5569.66,4561.49) 5854.66,4561.49 v1(6019.66,4726.49)
PB5: SW7.D U2.41 | length 1334.6
  Top Layer w10.63: v1(4626.57,4721.92) 4700.67,4796.02 U2.41
  Bottom Layer w10.63: SW7.D 4041.57,4751.92 4596.57,4751.92 v1(4626.57,4721.92)
PB6: SW7.A U2.42 | length 1879.8
  Top Layer w10.63: SW7.A 3876.57,4016.05 4011.57,4016.05 4191.57,4196.06 4191.57,4271.06 4206.57,4286.06 4356.57,4286.06 4401.57,4241.06 4401.57,4211.06 4431.57,4181.06 4461.57,4181.06 4491.57,4211.06 4491.57,4541.06 4726.85,4776.33 U2.42
PB7: SW7.B U2.43 U3.4 | length 1526.2
  Top Layer w10.63: v1(4590,4276.49) 4590,4606.49 4740,4756.49 U2.43
  Bottom Layer w10.63: U3.4 v1(4590,4276.49)
  Bottom Layer w15: SW7.B 4119.57,3806.05 U3.4
PB8: U1.3 U2.45 U3.5 | length 2688.1
  Top Layer w10.63: U3.5 4652.68,4239.17 4652.68,4639.17 4730.79,4717.28 U2.45 4832.68,4717.28 4840.18,4709.78 4855.18,4709.78 4880,4734.59 4880,4741.49 v1(4850,4771.49)
  Bottom Layer w10.63: v1(4850,4771.49) 4805,4816.49 4805,5011.49 5000,5206.49 5000,5251.49 5120,5371.49 5945,5371.49 6065,5491.49 6095,5491.49 6125,5521.49 6125,5596.49 U1.3
PB9: U1.4 U2.46 U3.6 | length 2471.5
  Top Layer w10.63: U3.6 4720,4256.49 4720,4670.41 v1(4743.6,4694.01) 4747.17,4697.59 U2.46
  Bottom Layer w10.63: v1(4743.6,4694.01) 4743.6,4974.72 4895,5126.12 4895,5256.49 5030,5391.49 5930,5391.49 U1.4
PB10: U1.5 U2.21 U4.11 | length 1920.3
  Top Layer w10.63: U2.21 5215.24,4815.7 v1(5220.66,4821.11)
  Bottom Layer w10.63: v1(5220.66,4821.11) 5075.02,4821.11 5054.29,4841.84 5054.29,4855.78 5107.32,4908.81 5107.32,5088.81 U4.11@5255,5236.49
  Bottom Layer w15: U4.11 5255,5236.49 5285,5236.49 5330,5281.49 5675,5281.49 5765,5191.49 6095,5191.49 6125,5221.49 6125,5396.49 U1.5
PB11: U1.6 U2.22 U4.10 | length 1500.7
  Top Layer w10.63: U2.22 5201.96,4835.39 5216.68,4850.1 5216.68,5129.81 5155,5191.49 v1(5150,5191.49)
  Top Layer w15: v1(5480,5311.49) 5510,5281.49 v1(5750,5281.49)
  Bottom Layer w10.63: v1(5150,5191.49) U4.10
  Bottom Layer w15: U4.10 5225,5311.49 v1(5480,5311.49) ; v1(5750,5281.49) 5810,5341.49 U1.6
PB12: U1.7 U2.25 U4.9 | length 1437.8
  Top Layer w10.63: v1(5063.27,5124.76) 5078.27,5109.76 U2.25
  Bottom Layer w10.63: v1(5063.27,5124.76) 5075,5136.49 U4.9@5075,5241.49
  Bottom Layer w15: U4.9 5055,5241.49 5075,5241.49 5090,5241.49 5195,5346.49 5645,5346.49 5750,5241.49 U1.7
PB13: U1.8 U2.26 U4.8 | length 1730.3
  Top Layer w10.63: U4.8 5000,5186.49 5086.26,5186.49 ; U2.26 5058.58,4888.81 5060.9,4886.49 5086.26,4886.49 5101.26,4901.49 5101.26,5126.49 5086.26,5141.49 5086.26,5186.49 ; v1(5495,5171.49) 5495,5261.49 5465,5291.49 5131.26,5291.49 5101.26,5261.49 5101.26,5216.49 5086.26,5201.49 5086.26,5186.49
  Bottom Layer w10.63: v1(5495,5171.49) 5525,5141.49 U1.8
PB14: U2.27 U4.7 | length 393.4
  Top Layer w10.63: U4.7 5053.9,5032.59 5053.9,4978.81 5038.9,4963.81 U2.27
PB15: U2.28 U4.6 | length 429.7
  Top Layer w10.63: U4.6 4902.68,5083.81 v1(4914.21,5083.81) ; U2.28 v1(5019.21,4993.81)
  Bottom Layer w10.63: v1(4914.21,5083.81) 5004.21,4993.81 v1(5019.21,4993.81)
PC13: U2.2 U3.7 | length 382.8
  Top Layer w10.63: U3.7 4881.42,4267.91 U2.2
PC14: U2.3 U3.8 | length 385.9
  Top Layer w10.63: U2.3 4901.1,4275.39 U3.8
PC15: U2.4 U3.9 | length 419.1
  Top Layer w10.63: U2.4 4920.79,4355.7 U3.9
PD0: C1.2 U2.5 X1.1 | length 827.4
  Top Layer w10.63: v1(4402.44,4801.49) 4462.44,4801.49 v1(4537.44,4726.49) ; v1(4897.44,4651.49) 4918.15,4651.49 4942.44,4627.19 4942.44,4601.14 U2.5
  Bottom Layer w10.63: X1.1@4357.44,4846.49 v1(4402.44,4801.49) ; v1(4537.44,4726.49) 4642.44,4621.49 4867.44,4621.49 v1(4897.44,4651.49)
  Bottom Layer w15: C1.2 4357.44,4906.49 4357.44,4846.49 4357.44,4840.5 X1.1
PD1: C3.2 U2.6 X1.2 | length 751.2
  Top Layer w10.63: U2.6 v1(4960.16,4644.17)
  Bottom Layer w10.63: 4362.44,4601.49 4917.48,4601.49 v1(4960.16,4644.17)
  Bottom Layer w15: C3.2 4362.44,4571.49 4362.44,4601.49 4362.44,4637.47 X1.2
VBAT: J1.1 SW8.1 | length 559.5
  Bottom Layer w15: J1.1 3503.66,3678.85 SW8.1
VBAT1: C24.1 SW8.2 U9.1 | length 1191.1
  Top Layer w15: SW8.2 3903.24,3614.72 4372.45,3614.72 4462.45,3524.72 ; U9.1@4537.45,3663.92 4462.45,3588.92 4462.45,3524.72 ; C24.1 4462.45,3419.72 4462.45,3524.72
pads on no net: SW2.1 SW2.4 SW4.2 SW4.3 SW5.2 SW5.3 SW6.2 SW6.3 SW8.3 TP7.1 TP8.1 TP9.1 TP10.1 U6.9 U6.10 U6.11 U6.12 U6.15 U8.2 U10.1 U10.6 U10.7 U13.7 USB1.3 USB1.4 USB1.9 USB1.10 USB1.13 USB1.14

## Polygon pours and split planes (outlines as drawn)
AGND on Top Layer "Top Layer-AGND" (solid, remove dead copper, pour order 2): 3005,6496.49 5955,6496.49 5955,5321.49 3005,5321.49
GND on Top Layer "Top Layer-GND" (solid, remove dead copper, pour order 0): 5935,6506.49 5935,5336.49 3005,5336.49 3005,3121.49 3000,3116.49 6247.01,3116.49 6247.01,6494.48 6235,6506.49
AGND on Bottom Layer "Bottom Layer-AGND" (solid, remove dead copper, pour order 4): 3005,6496.49 5940,6496.49 5940,5321.49 3005,5321.49
GND on Bottom Layer "Bottom Layer-GND" (solid, remove dead copper, pour order 6): 5935,6491.49 5935,5326.49 3005,5326.49 3005,3109.48 6250,3109.48 6250,6491.49

## Keep-outs
Board Outline Layer:
  lines w10: 3005,3114.48 6247.01,3114.48 6247.01,6496.49 3005,6496.49 3005,3114.48

## Silkscreen, mask and mechanical layers (free items; w line width, h text height)
Top Silkscreen Layer:
  text "1/50" at 5555,6336.49 h60
  text "AC" at 4195,6331.49 h60
  text "DC" at 4790,6331.49 h60
  text "1" at 4905,6331.49 h60
  text "3.3V" at 4200,5131.49 h40
  text "GND" at 4300,5131.49 h40
  text "PA12" at 4400,5131.49 h40
  text "PA11" at 4500,5131.49 h40
  text "PA8" at 4600,5131.49 h40
  text "PA15" at 4700,5131.49 h40
  text "PB14" at 4800,5131.49 h40
  text "PB13" at 4900,5131.49 h40
  text "PB12" at 5000,5131.49 h40
  text "PB11" at 5100,5131.49 h40
  text "PB10" at 5200,5131.49 h40
  text "PB1" at 5300,5131.49 h40
  text "PB0" at 5400,5131.49 h40
  text "PA7" at 5500,5131.49 h40
  text "PA6" at 5600,5131.49 h40
  text "GND" at 5890,4536.49 h40
  text "BOOT1" at 5970,4536.49 h40
  text "3.3V" at 6090,4536.49 h40
  text "5V" at 4210,4301.49 h40
  text "GND" at 4310,4301.49 h40
  text "PA15" at 4410,4301.49 h40
  text "PB7" at 4510,4301.49 h40
  text "PB8" at 4610,4301.49 h40
  text "PB9" at 4710,4301.49 h40
  text "PC13" at 4810,4301.49 h40
  text "PC14" at 4910,4301.49 h40
  text "PC15" at 5010,4301.49 h40
  text "PA0" at 5110,4301.49 h40
  text "PA1" at 5210,4301.49 h40
  text "PA4" at 5310,4301.49 h40
  text "PA5" at 5410,4301.49 h40
  text "GND" at 5510,4301.49 h40
  text "3.3V" at 5610,4301.49 h40
  text "GND" at 5890,4276.49 h40
  text "BOOT0" at 5970,4276.49 h40
  text "3.3V" at 6085,4276.49 h40
  text "PWM" at 6205,4096.49 h60 r90
  text "PB0" at 4410,4031.49 h40
  text "PB2" at 5485,4031.49 h40
  text "PB1" at 4935,4026.49 h40
  text "GND" at 6205,3801.49 h60 r90
  text "SWD" at 5605,3596.49 h60

## Text inside footprints (layer, text, board x,y; h text height)
U1: Mechanical 6 "GND" at 5969.06,5875.04 h44.4 r270; Mechanical 6 "VCC" at 5969.06,5770.04 h44.4 r270; Mechanical 6 "SCL" at 5969.06,5665.04 h44.4 r270; Mechanical 6 "SDA" at 5969.06,5560.04 h44.4 r270; Mechanical 6 "RES" at 5969.06,5455.04 h44.4 r270; Mechanical 6 "DC" at 5969.06,5352.19 h44.4 r270; Mechanical 6 "CS" at 5969.06,5257.19 h44.4 r270; Mechanical 6 "BL" at 5969.06,5152.19 h44.4 r270